# EAGLE board GF_RemoteDoorOpener_RX (EAGLE 7.5.0)
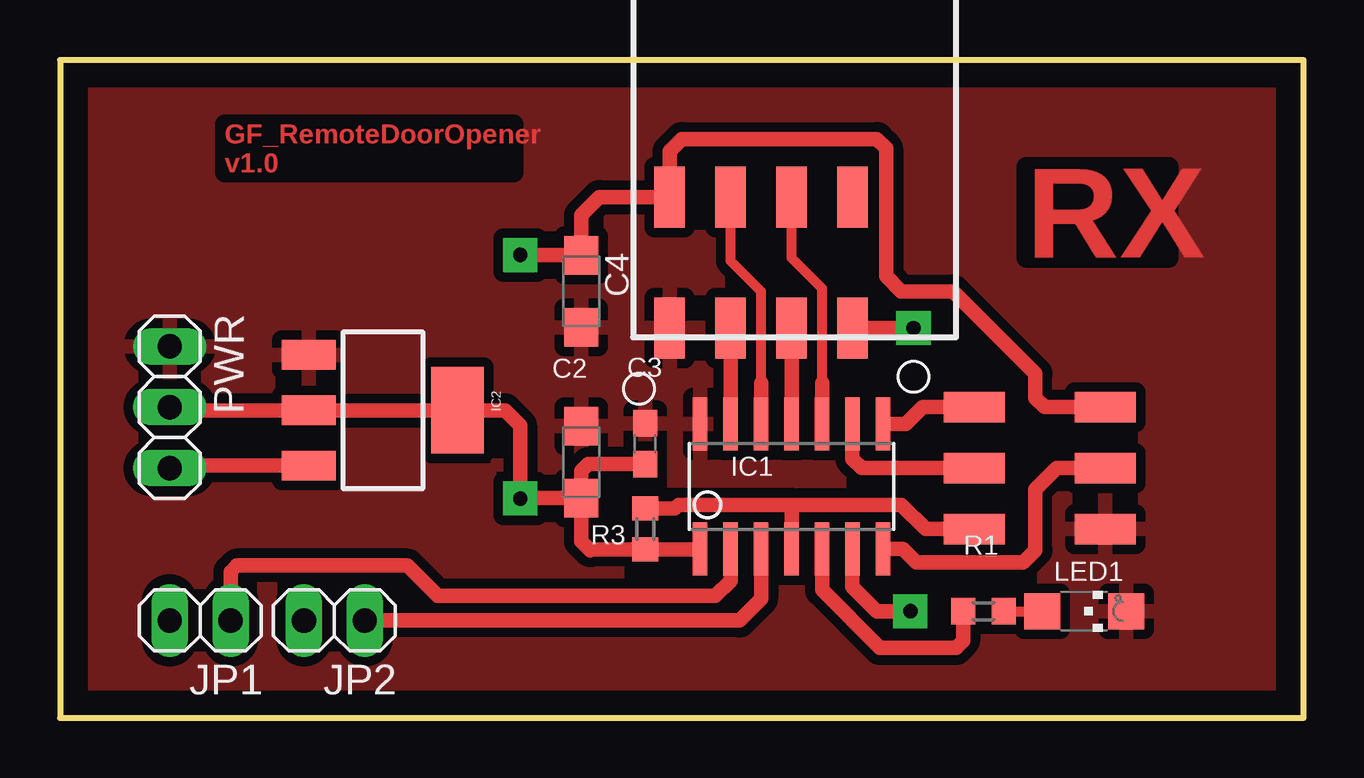
[diagram p0: board, top side]
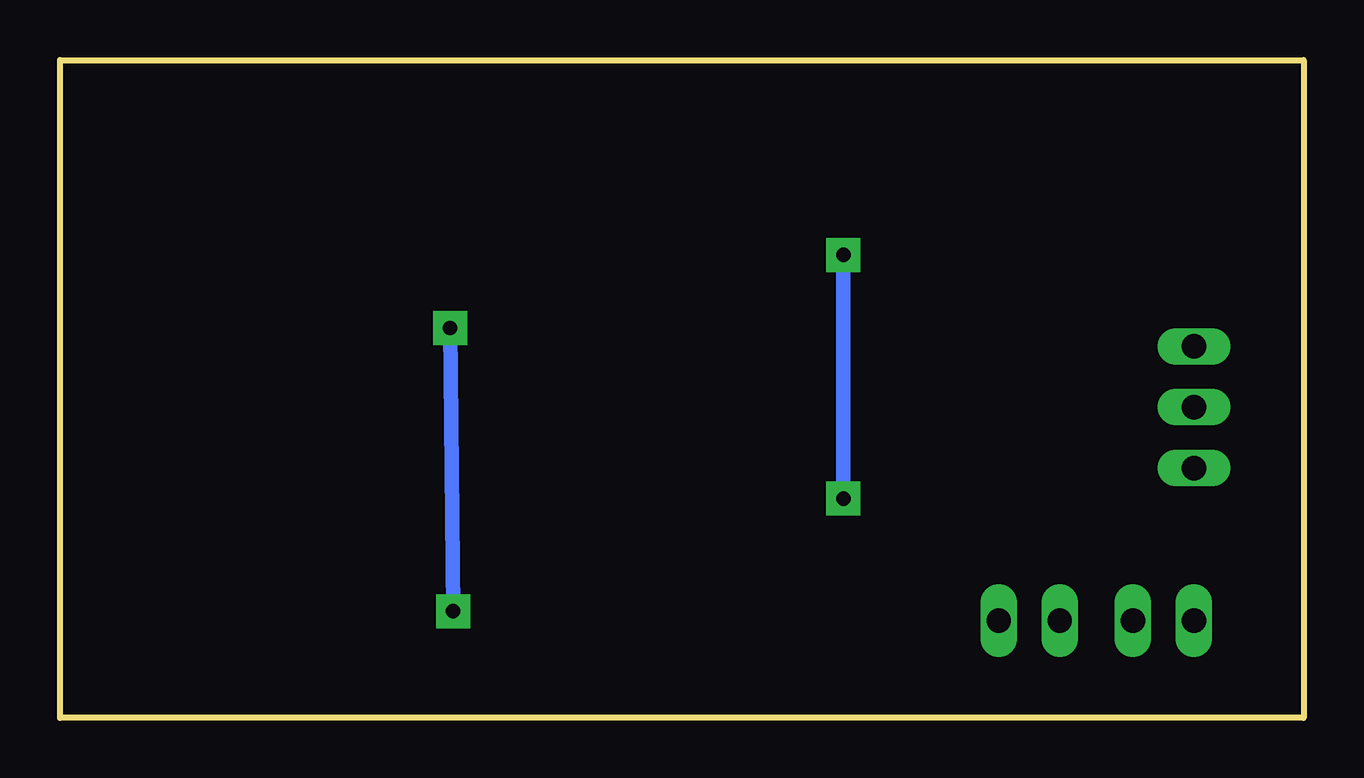
[diagram p1: board, bottom side, seen from below]

Size 51.82 x 27.43 mm. Coordinates in mm from the lower left corner, seen from the top.
Outline: 0,0 51.82,0 51.82,27.43 0,27.43 0,0
Copper layers (1*16): Top 0.035mm / dielectric 1.5mm / Bottom 0.035mm
Design rules "default *": minimum track width 10mil, minimum drill 24mil, track to track 8mil, track to pad 8mil, pad to pad 8mil, via to via 8mil, smd to smd 8mil, copper to edge 40mil, drill to drill 8mil, minimum pad ring 10mil, minimum via ring 8mil, stop-mask expansion 4mil, vias tented up to drill 0mil, thermal gap 16mil

## Footprints (pad centres in the part's own frame; a part is rotated, then mirrored left to right if it is on the bottom)
SMC_A = smd 1.6 x 1.4: + -1.5,0; - 1.5,0
C0603 = smd 1.1 x 1: 1 -0.85,0; 2 0.85,0
SOIC14 = smd 0.61 x 2.21: 1 -3.81,-2.603; 2 -2.54,-2.603; 3 -1.27,-2.603; 4 0,-2.603; 5 1.27,-2.603; 6 2.54,-2.603; 7 3.81,-2.603; 8 3.81,2.603; 9 2.54,2.603; 10 1.27,2.603; 11 0,2.603; 12 -1.27,2.603; 13 -2.54,2.603; 14 -3.81,2.603
SOT223 = smd 1.219 x 2.235: 1 -2.311,-3.099; 2 0,-3.099; 3 2.311,-3.099 | smd 3.6 x 2.2: 4 0,3.099
2X3_SMD = smd 2.54 x 1.27: 1 -2.54,2.54; 2 2.92,2.54; 3 -2.54,0; 4 2.92,0; 5 -2.54,-2.54; 6 2.92,-2.54
1X02 = drill 1.016 long: 1 -1.27,0; 2 1.27,0
CHIPLED_1206 = smd 1.5 x 1.5: A 0,-1.75; C 0,1.75
1X03 = drill 1.016 long: 1 -2.54,0; 2 0,0; 3 2.54,0
R0603 = smd 1 x 1.1: 1 -0.85,0; 2 0.85,0
2X4_SMD = smd 2.54 x 1.27: 1 -2.54,3.81; 2 2.92,3.81; 3 -2.54,1.27; 4 2.92,1.27; 5 -2.54,-1.27; 6 2.92,-1.27; 7 -2.54,-3.81; 8 2.92,-3.81

## Placement (x,y rotation side)
C2  4u7  [SMC_A]  21.72,10.67 90 top
C3  100n  [C0603]  24.38,11.43 90 top
C4  1uF  [SMC_A]  21.72,17.78 270 top
IC1  ATTINY44  [SOIC14]  30.48,9.65 0 top
IC2  [SOT223]  13.46,12.83 270 top
ISP  [2X3_SMD]  40.64,10.41 0 top
JP1  [1X02]  5.84,4.06 180 top
JP2  [1X02]  11.43,4.06 180 top
LED1  [CHIPLED_1206]  42.67,4.45 270 top
PWR  [1X03]  4.57,12.95 270 top
R1  10k  [R0603]  38.48,4.45 180 top
R3  10k  [R0603]  24.38,7.87 270 top
U$2  2X4HEADER  [2X4_SMD]  29.21,18.8 90 top

## Library data of the parts
C2-C4 R1 R3 = rcl
IC1 = attiny24_44_84
IC2 = SparkFun-PowerIC
ISP U$2 = mellis
JP1 JP2 PWR = pinhead
LED1 = led

## Nets
GND: C2.- C3.2 C4.- IC1.14 IC2.1 ISP.6 LED1.C PWR.1 U$2.1
MISO: IC1.8 ISP.1
MOSI: IC1.7 ISP.4
N$1: IC1.5 R1.2
N$2: IC2.3 PWR.3
N$3: LED1.A R1.1
OUT1: IC1.2 JP1.1
OUT2: IC1.3 JP2.1
RESET: IC1.4 ISP.5 R3.1
S_CE: IC1.13 U$2.3
S_CSN: IC1.12 U$2.4
S_IRQ: U$2.8
S_MISO: IC1.6 U$2.7
S_MOSI: IC1.10 U$2.6
S_SCK: IC1.11 U$2.5
SCK: IC1.9 ISP.3
VCC: C2.+ C3.1 C4.+ IC1.1 IC2.2 IC2.4 ISP.2 PWR.2 R3.2 U$2.2

## Tracks (layer width: path | path; a pad name or v marks a point on that pad's centre or on a via)
GND
  pour Top (isolate 0.406): 0,0 51.82,0 51.82,27.43 0,27.43
MISO
  Top 0.61: IC1.8 35.24,12.26 35.94,12.95 ISP.1
MOSI
  Top 0.61: IC1.7 35.12,7.05 35.69,6.48 40.13,6.48 40.64,6.99 40.64,9.53 41.53,10.41 ISP.4
N$1
  Top 0.61: IC1.5 31.75,5.33 34.16,2.92 37.34,2.92 37.63,3.21 R1.2
N$2
  Top 0.61: IC2.3 4.67,10.52 PWR.3
N$3
  Top 0.406: R1.1 LED1.A
OUT1
  Top 0.61: IC1.2 27.94,5.71 27.3,5.08 15.75,5.08 14.48,6.35 7.37,6.35 7.11,6.1 JP1.1
OUT2
  Top 0.61: IC1.3 29.21,4.95 28.32,4.06 JP2.1
RESET
  Top 0.61: IC1.4 30.48,8.89 | 30.48,8.89 25.78,8.89 25.61,8.72 R3.1 | 30.48,8.89 35.05,8.89 36.07,7.87 ISP.5
S_CE
  Top 0.61: IC1.13 U$2.3
S_CSN
  Top 0.406: 29.21,13.97 29.21,17.78 27.94,19.05 U$2.4
  Top 0.61: IC1.12 29.21,13.97
S_MISO  (via drill 0.6 pad 1.42)
  Top 0.61: v35.56,16.26 U$2.7 | v35.43,4.45 34.04,4.45 33.02,5.46 IC1.6
  Bottom 0.61: v35.56,16.26 v35.43,4.45
S_MOSI
  Top 0.406: 31.75,13.97 31.75,17.91 30.48,19.18 U$2.6
  Top 0.61: IC1.10 31.75,13.97
S_SCK
  Top 0.61: IC1.11 U$2.5
SCK
  Top 0.61: IC1.9 33.02,10.79 33.4,10.41 ISP.3
VCC  (via drill 0.6 pad 1.42)
  Top 0.61: IC1.1 26.64,7.02 R3.2 22.06,7.02 | 22.06,7.02 21.72,7.37 C2.+ | C3.1 22.01,10.58 21.72,10.29 C2.+ | ISP.2 41.02,12.95 40.64,13.34 40.64,14.35 37.21,17.78 35.05,17.78 34.42,18.41 34.42,23.75 34.04,24.13 25.91,24.13 25.4,23.62 U$2.2 22.48,21.72 21.72,20.95 C4.+ 21.82,19.3 v19.18,19.3 | C2.+ 19.33,9.17 v19.18,9.14 19.18,12.19 18.54,12.83 IC2.4 IC2.2 4.7,12.83 PWR.2 | 22.1,6.99 22.06,7.02
  Bottom 0.61: v19.18,9.14 v19.18,19.3

## Text on the board
Top: GF_RemoteDoorOpener / v1.0 | RX